# EAGLE board dnc_old (EAGLE 7.1.0)

Size 100 x 80 mm. Coordinates in mm from the lower left corner, seen from the top.
Outline: 0,0 100,0 100,80 0,80 0,0
Copper layers (1*16): Top 0.035mm / dielectric 1.5mm / Bottom 0.035mm
Design rules "default": minimum track width 10mil, minimum drill 24mil, track to track 8mil, track to pad 8mil, pad to pad 8mil, via to via 8mil, smd to smd 8mil, copper to edge 40mil, drill to drill 8mil, minimum pad ring 10mil, minimum via ring 8mil, stop-mask expansion 4mil, vias tented up to drill 0mil, thermal gap 10mil

## Footprints (pad centres in the part's own frame; a part is rotated, then mirrored left to right if it is on the bottom)
TQFP32-08 = smd 1.27 x 0.559: 1 -4.293,2.8; 2 -4.293,2; 3 -4.293,1.2; 4 -4.293,0.4; 5 -4.293,-0.4; 6 -4.293,-1.2; 7 -4.293,-2; 8 -4.293,-2.8; 17 4.293,-2.8; 18 4.293,-2; 19 4.293,-1.2; 20 4.293,-0.4; 21 4.293,0.4; 22 4.293,1.2; 23 4.293,2; 24 4.293,2.8 | smd 0.559 x 1.27: 9 -2.8,-4.293; 10 -2,-4.293; 11 -1.2,-4.293; 12 -0.4,-4.293; 13 0.4,-4.293; 14 1.2,-4.293; 15 2,-4.293; 16 2.8,-4.293; 25 2.8,4.293; 26 2,4.293; 27 1.2,4.293; 28 0.4,4.293; 29 -0.4,4.293; 30 -1.2,4.293; 31 -2,4.293; 32 -2.8,4.293
YUN-RECEIVE = drill 0.8 long: 5V2 0,-27.94; 5VFROMARDUINO -6.35,12.7; +3.3VFROMYUN -1.27,12.7; GND 5.08,-27.94; GND2 2.54,-27.94; RAW 7.62,-27.94; RX 25.4,20.32; SELECTFORLEVELER -3.81,12.7; TX 22.86,20.32 | drill 0.8 offset: ICSP-5V 28.067,0; ICSP-/RESET 25.527,-5.08; ICSP-GND 28.067,-5.08; ICSP-MISO 25.527,0; ICSP-MOSI 28.067,-2.54; ICSP-SCK 25.527,-2.54 | hole 3.2: 27.94,5.08; 27.94,-22.86; -22.86,20.32; -24.13,-27.94

## Placement (x,y rotation side)
U1  ATMEGA168  [TQFP32-08]  -5.08,-46.99 0 top  (outside the outline)
U$1  YUNBOARD_CONNECT  [YUN-RECEIVE]  48.26,-24.13 0 top  (outside the outline)

## Library data of the parts
U1 = SparkFun
U$1 = pierre_vv